# Altium PCB Isolated-ADCs-PCB.PcbDoc
Units mil, origin at the board's own origin, x right, y up, seen from the top; angles counter-clockwise.
Board outline 2120 x 1465.54 mil, 4 copper layers (Top Layer, Mid-Layer 1, Mid-Layer 2, Bottom Layer), stack 60.6 mil thick; 32 components, 24 nets, 130 pads, 341 vias.
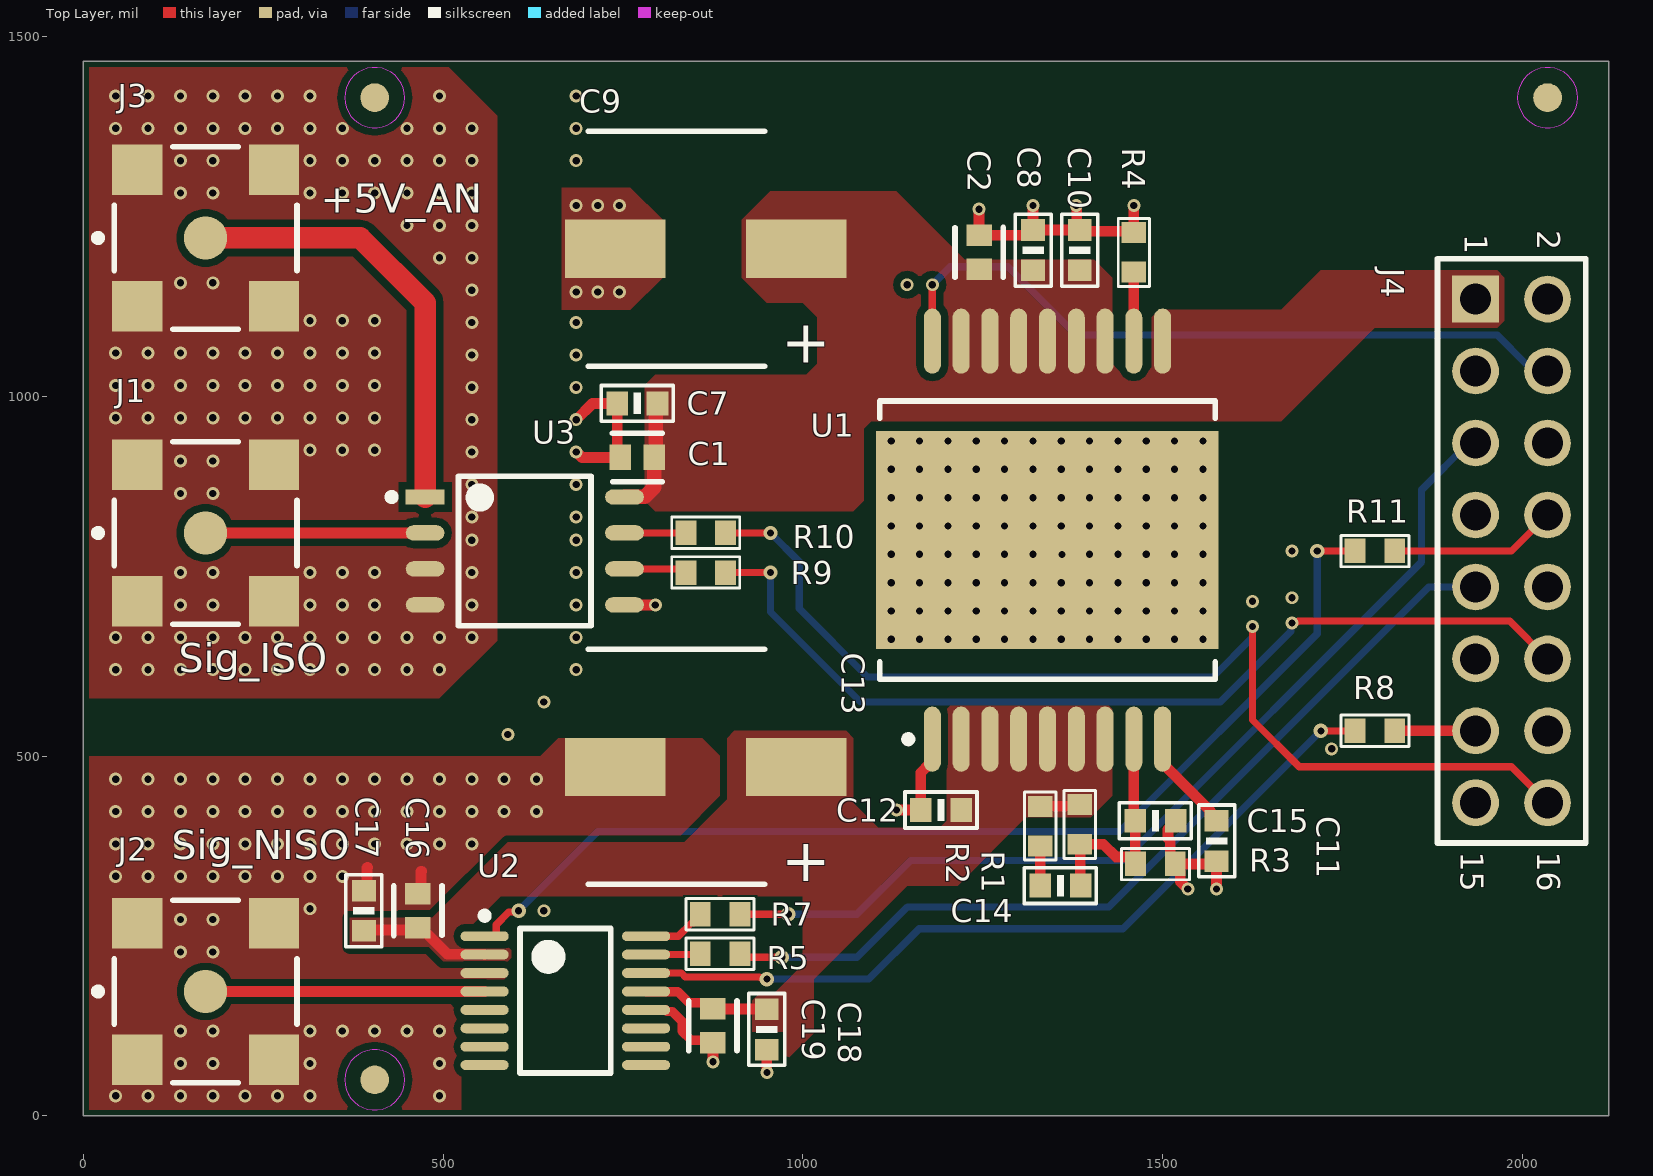
[diagram p0: Top Layer view]
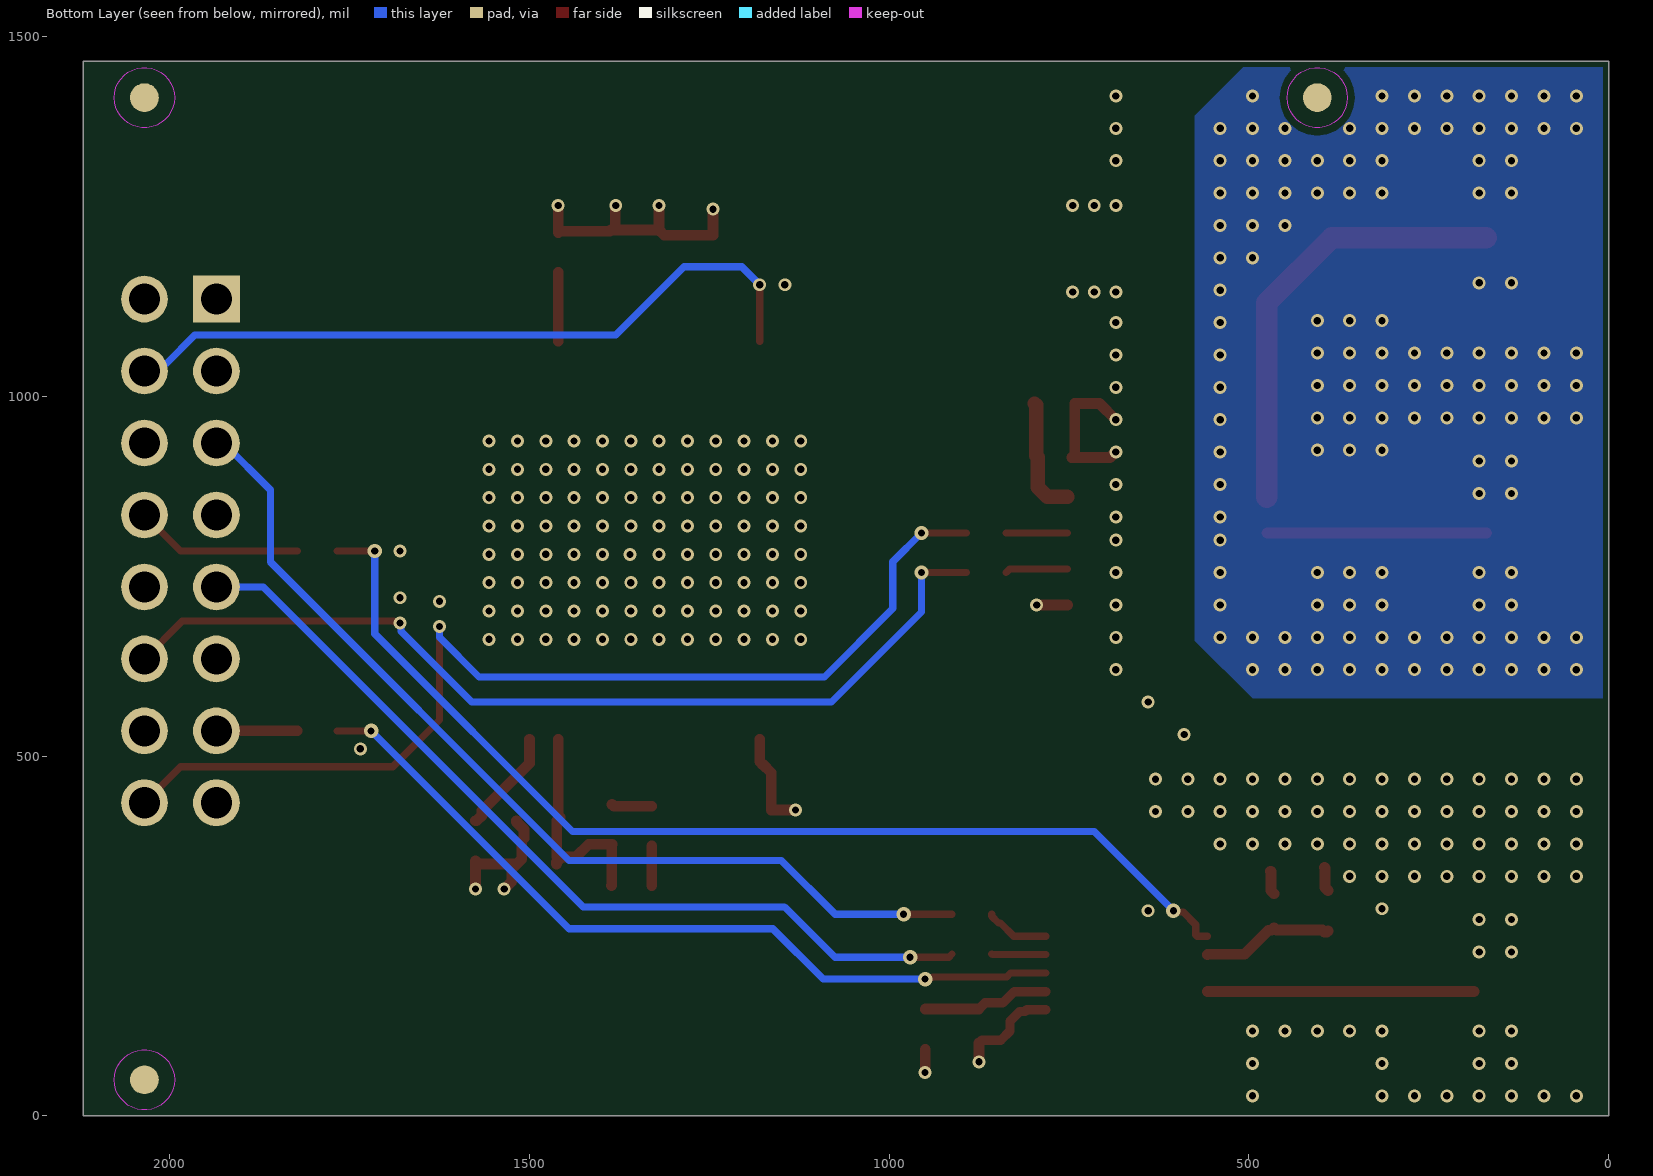
[diagram p1: Bottom Layer view, seen from below]
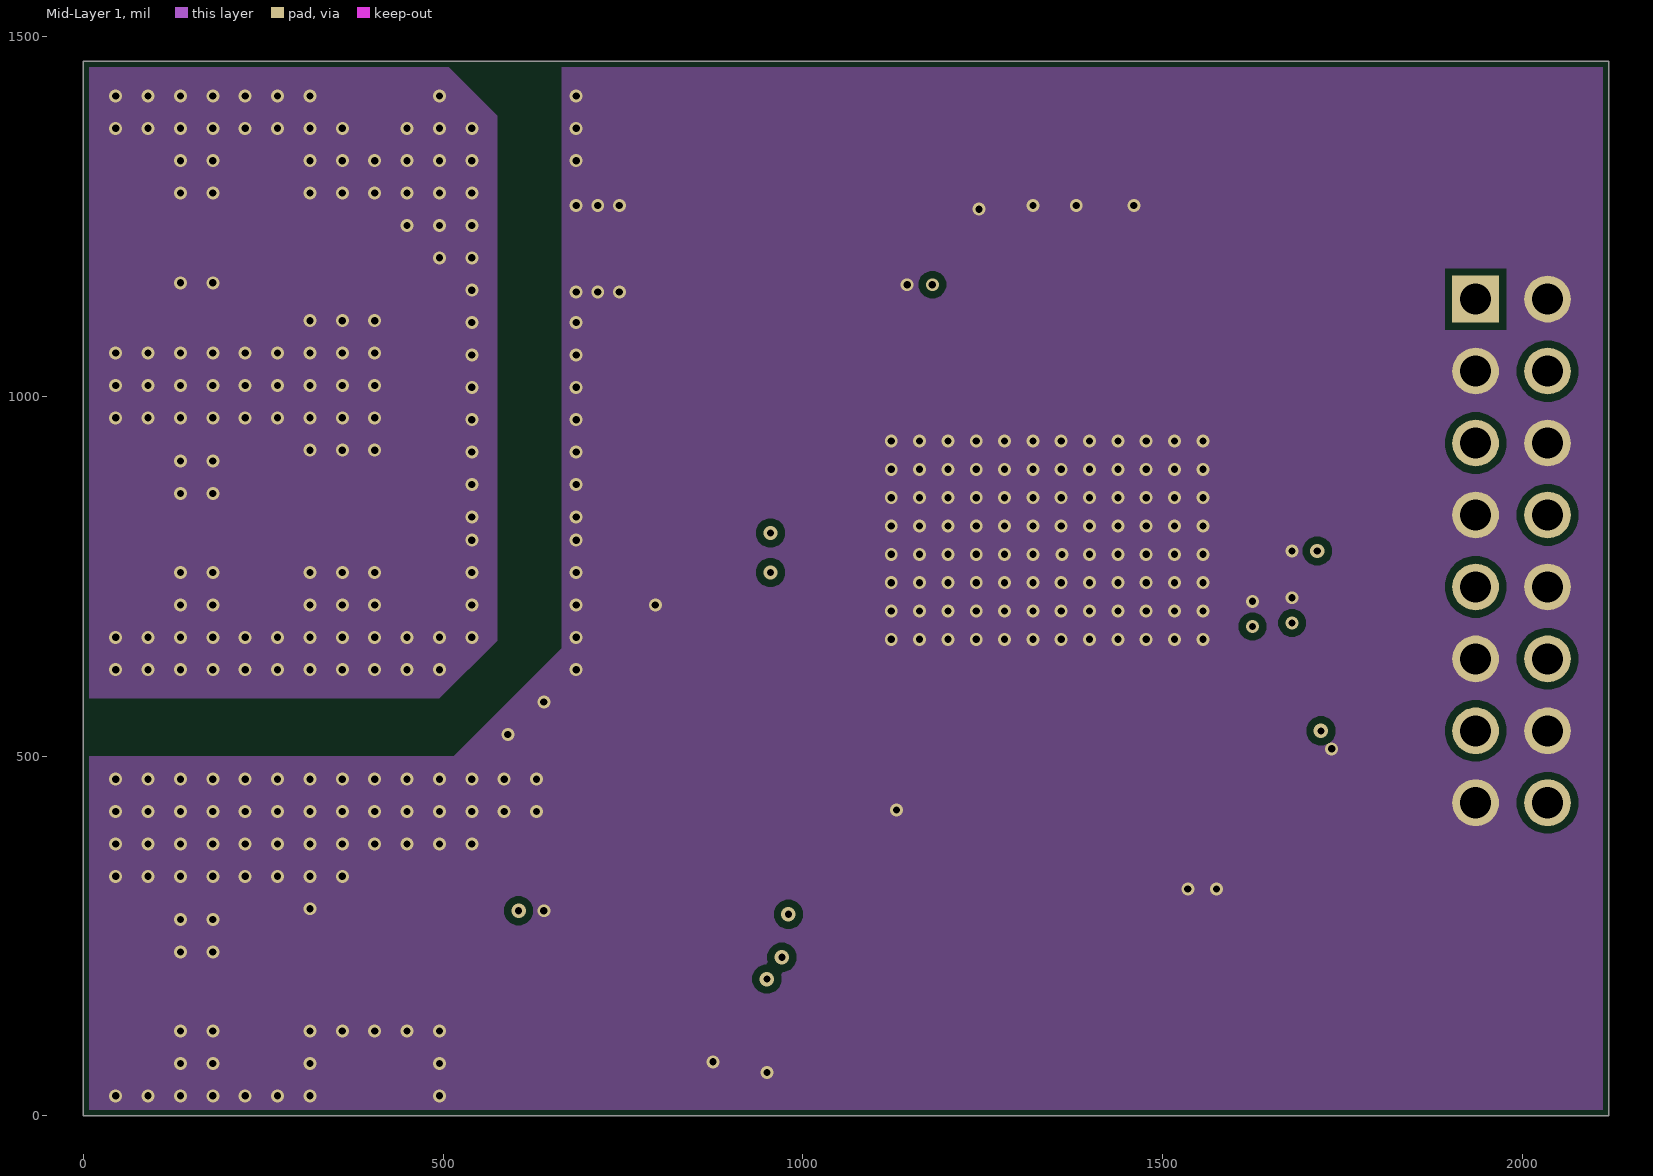
[diagram p2: Mid-Layer 1]
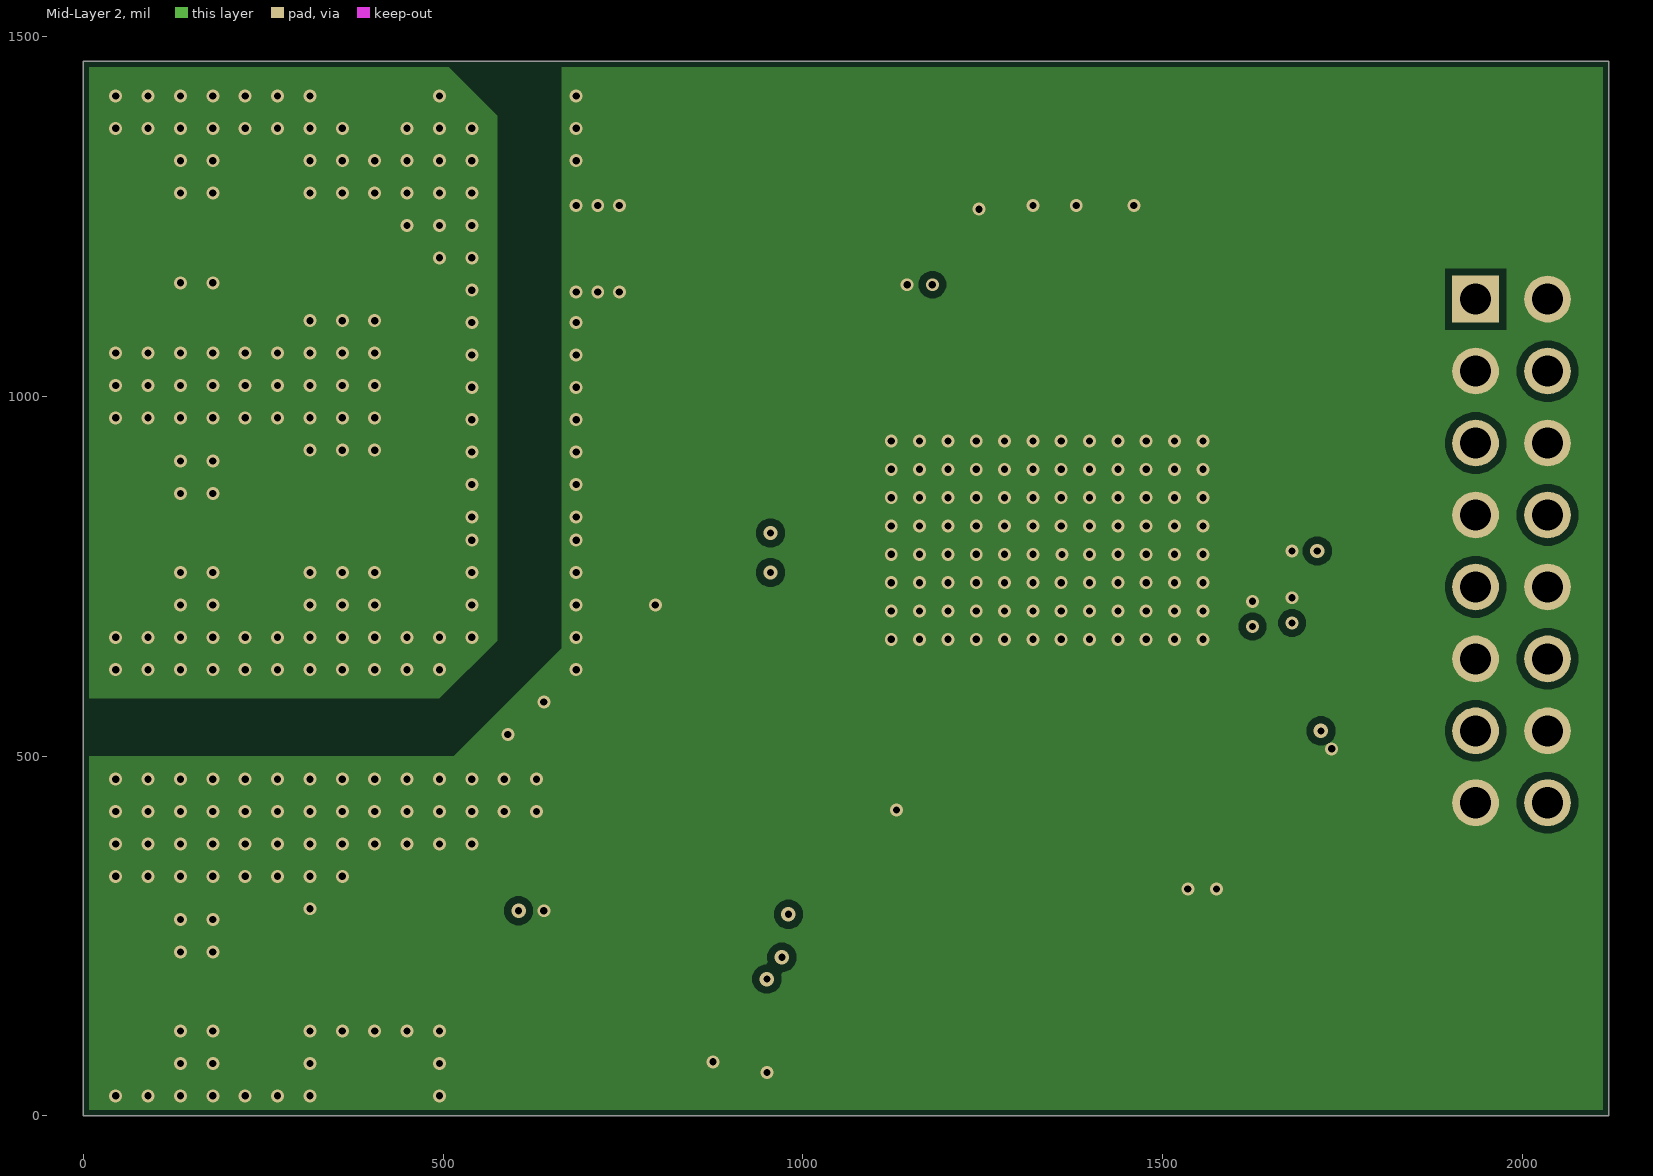
[diagram p3: Mid-Layer 2]
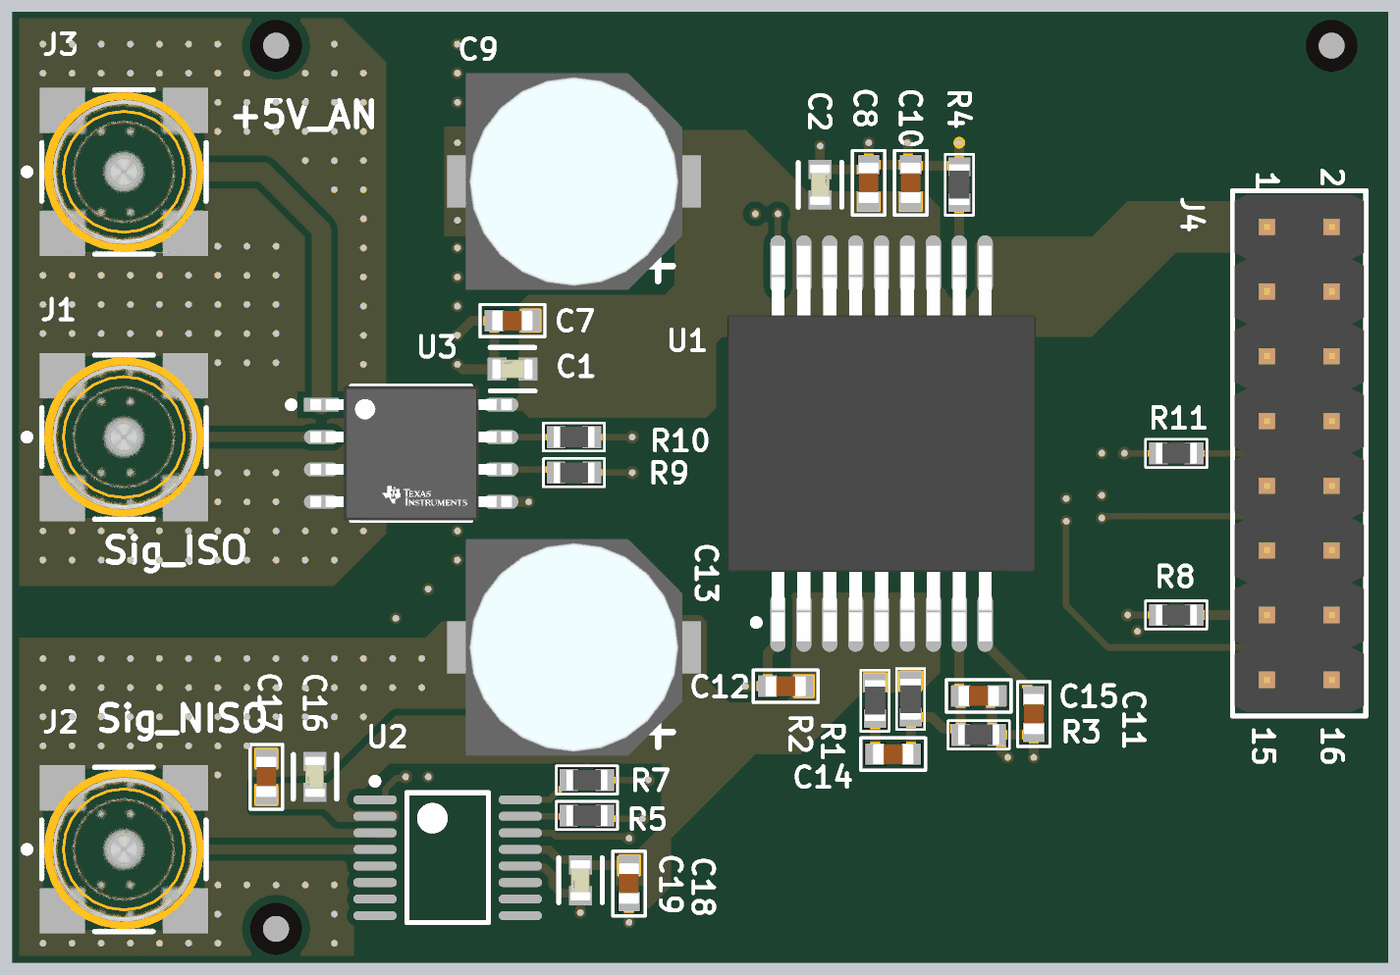
[diagram p4: 3D render of the assembled board from above, using the file's embedded part models]

## Layer stack, top to bottom
Top Solder: solder mask 0.4, Solder Resist, Dk 3.5
Top Layer: signal copper 1.4
Dielectric 1: prepreg 5, PP-006, Dk 4.1
Mid-Layer 1: signal copper 1.4
Dielectric 2: dielectric 45, FR-4, Dk 4.8
Mid-Layer 2: signal copper 1.4
Dielectric 3: prepreg 5, PP-006, Dk 4.1
Bottom Layer: signal copper 1.4
Bottom Solder: solder mask 0.4, Solder Resist, Dk 3.5

## Board outline
0,0 0,1465.54 2120,1465.54 2120,0

## Design rules (kind name [scope] priority, off if disabled: settings)
BoardOutlineClearance [All] p1: gap=8 ignorepadtopadclearanceinfootprint=FALSE
Clearance [All] p1: gap=10 ignorepadtopadclearanceinfootprint=FALSE except(0: Arc-Hole Track-Hole SMDPad-Hole THPad-Hole Via-Hole Fill-Hole Poly-Hole Region-Hole Text-Hole)
MinimumSolderMaskSliver [All] p1: minsoldermaskwidth=5
PolygonConnect [All] p1: connectstyle=Direct reliefconductorwidth=10 reliefentries=4 polygonreliefangle="90 Angle" airgapwidth=10
RoutingVias [All] p1: holewidth=10 width=18 viastyle="Through Hole" minholewidth=8 minwidth=16 maxholewidth=20 maxwidth=28
SilkToSilkClearance [All] p1: silktosilkclearance=5
SilkToSolderMaskClearance [IsPad] p1: minsilkscreentomaskgap=1 clearancetoexposedcopper=TRUE
SolderMaskExpansion [All] p1: expansion=0 istentingtop=FALSE
Width [All] p1: maxlimit=50 minlimit=4 preferedwidth=6
27 further rules are at their usual default settings.

## Components (designator, comment, footprint, x,y, rotation, side; value= is the part's Value field where it differs from the comment)
C1 "0.10 μF" FP-C0603C-CF-MFG 770,915 r0 top
C2 "0.10 μF" FP-C0603C-CF-MFG 1245,1200 r270 top
C7 "10uF" CAPC1608X90N 770,990 r180 top
C8 "10uF" CAPC1608X90N 1320,1203 r90 top
C9 "220uF/25V" CAP_AE830X1050N 865,1205 r180 top
C10 "0.1uF/50V" CAPC1608X90N 1385,1203 r90 top
C11 "0.1uF/50V" CAPC1608X90N 1575,382 r270 top
C12 "0.1uF/50V" CAPC1608X90N 1192,425 r180 top
C13 "220uF/25V" CAP_AE830X1050N 865,485 r180 top
C14 "4.7nF" CAPC1608X90N 1358,320 r0 top
C15 "100pF" CAPC1608X90N 1490,410 r0 top
C16 "0.10 μF" FP-C0603C-CF-MFG 465,285 r90 top
C17 "1uF" CAPC1608X90N 390,285 r90 top
C18 "1uF" CAPC1608X90N 950,120 r90 top
C19 "0.10 μF" FP-C0603C-CF-MFG 875,125 r90 top
J1 "73251-1350" FP-73251-1350-MFG 170,810 r0 top
J2 "73251-1350" FP-73251-1350-MFG 170,172.8 r0 top
J3 "73251-1350" FP-73251-1350-MFG 170,1220 r0 top
J4 "61301621121" 61301621121 1985,785 r270 top
R1 "4.32K" RESC1608X55N 1385,405 r90 top
R2 "2.67K" RESC1608X55N 1330,402.56 r90 top
R3 "806R" RESC1608X55N 1490,350 r180 top
R4 "511R" RESC1608X55N 1460,1200 r270 top
R5 "22R" RESC1608X55N 885,225 r0 top
R7 "22R" RESC1608X55N 885,280 r0 top
R8 "22R" RESC1608X55N 1795,535 r0 top
R9 "22R" RESC1608X55N 865,755 r0 top
R10 "22R" RESC1608X55N 865,810 r0 top
R11 "22R" RESC1608X55N 1795,785 r180 top
U1 "ISL75051ASEHVFE" CFP102P1520X310-18AN 1340,800 r90 top
U2 "ADC128S102CIMTX" MTC16_N 670,160 r0 top
U3 "AMC1203BPSA" FP-PSA0008A-IPC_C 613.6,785 r0 top

## Footprints (in the part's own frame and the unit in brackets; to place one, negate y for a bottom-side part, rotate by r counter-clockwise, add the part's x,y. Pads: shape width x height; smd on the part's side, far side on the other; paste and mask are expansions set on the pad)
61301621121 [mm] "Pin Header, pitch 2.54 mm, THT, Vertical, dual row, 16p"
  rect 1.65x1.65 hole 1.1: 1(-8.89,-1.27)
  round 1.65 hole 1.1: 2(-8.89,1.27) 3(-6.35,-1.27) 4(-6.35,1.27) 5(-3.81,-1.27) 6(-3.81,1.27) 7(-1.27,-1.27) 8(-1.27,1.27) 9(1.27,-1.27) 10(1.27,1.27) 11(3.81,-1.27) 12(3.81,1.27) 13(6.35,-1.27) 14(6.35,1.27) 15(8.89,-1.27) 16(8.89,1.27)
  silkscreen extent -10.31,-2.62 10.31,2.62, body extent -10.16,-2.54 10.16,2.54, height 8.59
CAP_AE830X1050N [mm]
  rect 3.55x2.05 smd: 1(-3.2,0) 2(3.2,0)
  silkscreen extent -2.07,-4.15 4.15,4.15, body extent -4.25,-4.25 4.25,4.25, height 10.5
CAPC1608X90N [mil]
  rect 30x33 smd mask+2: 1(-28,0) 2(28,0)
  silkscreen extent -50,-25 50,25, body extent -31,-16 31,16, height 35
CFP102P1520X310-18AN [mm]
  oval 2.3x0.6 smd: 1(-7.025,4.064) 2(-7.025,3.048) 3(-7.025,2.032) 4(-7.025,1.016) 5(-7.025,0) 6(-7.025,-1.016) 7(-7.025,-2.032) 8(-7.025,-3.048) 9(-7.025,-4.064) 10(7.025,-4.064) 11(7.025,-3.048) 12(7.025,-2.032) 13(7.025,-1.016) 14(7.025,0) 15(7.025,1.016) 16(7.025,2.032) 17(7.025,3.048) 18(7.025,4.064)
  rect 7.7x12.09 smd paste-5.969: EP(0,0)
  silkscreen extent -7.15,-5.92 4.91,5.92, body extent -7.76,-6.04 7.77,6.05, height 3.1
FP-73251-1350-MFG [mil]
  round 60 smd paste+0 mask+0: 1(0,0)
  rect 70x70 smd paste+0 mask+0: 2(-95,95) 3(95,95) 4(-95,-95) 5(95,-95)
  silkscreen extent -155,-127 127,127, body extent -134,-134 134,134, height 10
FP-C0603C-CF-MFG [mm]
  rect 0.75x0.9 smd paste+0 mask+0: 1(-0.6,0) 2(0.6,0)
  silkscreen extent -0.87,-0.85 0.88,0.85, body extent -1.2,-0.6 1.2,0.6, height 0.25
FP-PSA0008A-IPC_C [mil]
  rect 53.76x21.49 smd paste+0 mask+0: 1(-138.6,75)
  rrect100% 53.76x21.49 smd paste+0 mask+0: 2(-138.6,25) 3(-138.6,-25) 4(-138.6,-75) 5(138.6,-75) 6(138.6,-25) 7(138.6,25) 8(138.6,75)
  silkscreen extent -190,-104 92,104, body extent -169,-108 169,108, height 10
MTC16_N [mm] "TSOP, 16-Leads, Body 5x4.4mm, Pitch 0.65mm, IPC Medium Density"
  oval 1.7x0.35 smd: 1(-2.85,2.275) 2(-2.85,1.625) 3(-2.85,0.975) 4(-2.85,0.325) 5(-2.85,-0.325) 6(-2.85,-0.975) 7(-2.85,-1.625) 8(-2.85,-2.275) 9(2.85,-2.275) 10(2.85,-1.625) 11(2.85,-0.975) 12(2.85,-0.325) 13(2.85,0.325) 14(2.85,0.975) 15(2.85,1.625) 16(2.85,2.275)
  silkscreen extent -2.97,-2.55 1.6,3.12, body extent -2.25,-2.55 2.25,2.55, height 1.1
RESC1608X55N [mil]
  rect 29x34 smd mask+2: 1(-27.56,0) 2(27.56,0)
  silkscreen extent -47,-22 47,22, body extent -31,-16 31,16, height 22

## Part data
C1 C2 C16 C19: library part CMP-2006-03056-2, "CAP CER 0.1UF 50V 5% X7R 0603", Manufacturer=KEMET, Manufacturer Part Number=C0603C104J5RACTU, Package=C0603C-CF, Temperature="-55°C to +125°C", Temperature Characteristic=X7R, Temperature Coefficient=30ppm/°C, Temperature Range High=+125°C, Temperature Range Low=-55°C, Tolerance=0.05, Voltage Rating="50 V", Automotive=Yes, Automotive Grade="Grade 1", Capacitance="0.10 μF", Category=Cap, ComponentLink2Description=Datasheet, ComponentLink2URL=https://api.kemet.com/component-edge/download/datasheet/C0603C100J5GACAUTO.pdf, Device Class L1="Passive Components", Device Class L2=Capacitors, Device Class L3="Ceramic Capacitors", Digikey Description="CAP CER 0.1UF 50V 5% X7R 0603", Height=0.87mm, Lead Free=Yes, Material=Ceramic, Mouser Description="Multilayer Ceramic Capacitors MLCC - SMD/SMT 50volts 0.1uF X7R 5%", Octopart=https://octopart.com/c0603c104j5ractu-kemet-10440638, RoHS=TRUE
C7 C8: library part "CAP CER 10UF 25V X5R 0603", "CAP CER 10UF 25V X5R 0603", Manufacturer="Murata Electronics", Manufacturer Part Number=GRM188R61E106KA73D, Package=0603, Supplier Part Number 1=490-18214-1-ND, Tolerance=±10%, Voltage - Rated=25V, ComponentLink1Description="New link", Height=1mm, Supplier 1=Digi-Key
C9 C13: library part "CAP ALUM 220UF 20% 25V SMD", "CAP ALUM 220UF 20% 25V SMD", Manufacturer="United Chemi-Con", Manufacturer Part Number=EMZA250ADA221MHA0G, Supplier Part Number 1=565-2550-1-ND, Tolerance=±20%, ComponentLink1Description="New link", Height=10.5mm, Supplier 1=Digi-Key
C10 C11 C12: library part "CAP CER 0.1UF 50V X7R 0603", "CAP CER 0.1UF 50V X7R 0603", Manufacturer="Samsung Electro-Mechanics", Manufacturer Part Number=CL10B104KB8NNNC, Package=0603, Supplier Part Number 1=1276-1000-1-ND, Tolerance=±10%, Voltage - Rated=50V, ComponentLink1Description="New link", Height=0.9mm, Supplier 1=Digi-Key
C14: library part "CAP CER 4700PF 50V C0G 0603", "CAP CER 4700PF 50V C0G 0603", Manufacturer="TDK Corporation", Manufacturer Part Number=CGA3E2C0G1H472J080AA, Package=0603, Supplier Part Number 1=445-6912-1-ND, Tolerance=5%, Voltage - Rated=50V, ComponentLink1Description="New link", Height=0.9mm, Supplier 1=Digi-Key
C15: library part "CAP CER 100PF 50V C0G/NP0 0603", "CAP CER 100PF 50V C0G/NP0 0603", Manufacturer="KYOCERA AVX", Manufacturer Part Number=06035A101FAT2A, Package=0603, Supplier Part Number 1=478-6202-1-ND, Tolerance=1%, Voltage - Rated=50V, ComponentLink1Description="New link", Height=0.9mm, Supplier 1=Digi-Key
C17 C18: library part "CAP CER 1UF 25V X7R 0603", "CAP CER 1UF 25V X7R 0603", Manufacturer="Murata Electronics", Manufacturer Part Number=GCM188R71E105KA64D, Package=0603, Supplier Part Number 1=490-10673-1-ND, Tolerance=±10%, Voltage - Rated=25V, ComponentLink1Description="New link", Height=0.9mm, Supplier 1=Digi-Key
J1 J2 J3: library part CMP-04764-000006-1, "CONN SMA JACK STR 50 OHM SMD", Frequency=18GHz, Manufacturer=Molex, Temperature="-65°C to +165°C", Temperature Range High=+165°C, Temperature Range Low=-65°C, Voltage Rating=500V, Automotive=No, Category=Conn, ComponentLink2Description=Datasheet, ComponentLink2URL=https://www.molex.com/pdm_docs/sd/732511350_sd.pdf, Conn Orientation=Straight, Contact Material=Gold, Device Class L1=Connectors, Device Class L2="RF / Coaxial Connectors", Device Class L3=unset, Digikey Description="CONN SMA JACK STR 50 OHM SMD", Footprint Url=https://forum.upverter.com/uploads/default/original/3X/d/a/daeafa2ce4908d4fc4e49f0b17d7d2c986fce444.pdf, Height=9.655mm, Impedance=50Ω, Is Female=yes, Lead Free=Yes, Manufacturer Part Number=73251-1350, Mouser Description="RF Connectors / Coaxial Connectors SMA ST PCB-JCK STD SMT", Number Of Contacts=1, Octopart=https://octopart.com/73251-1350-molex-5414390, Package=73251-1350, RoHS=TRUE, Shielding=true, Standoff Height=0.41mm
J4: library part CMP-1502-01097-1, "THT Vertical Pin Header WR-PHD, Pitch 2.54 mm, Dual Row, 16 pins", Contact Resistance=20mOhm, Manufacturer="Wurth Elektronik", Operating Temperature=-40to105degC, Rated Current=3A, Withstanding Voltage=500VAC, Working Voltage=250VAC, Datasheet URL=https://katalog.we-online.de/em/datasheet/6130xx21121.pdf, Gender=Male, Manufacturer URL=http://www.we-online.de, Mounting Technology=THT, Orientation=Vertical, Package Reference=61301621121, Packaging=Bag, Part Number=61301621121, Pin Number=16, Pitch=2.54mm, Publisher=WurthElektronik, Row Number=Dual
R1: library part "RES SMD 4.32K OHM 0.5% 1/5W 0603", "RES SMD 4.32K OHM 0.5% 1/5W 0603", Manufacturer="Panasonic Electronic Components", Manufacturer Part Number=ERJ-PB3D4321V, Package=0603, Supplier Part Number 1=P20355CT-ND, Tolerance=0.5%, Height=0.55mm, Supplier 1=Digi-Key
R2: library part "RES SMD 2.67KOHM 0.5% 1/10W 0603", "RES SMD 2.67KOHM 0.5% 1/10W 0603", Manufacturer=Yageo, Manufacturer Part Number=RT0603DRD072K67L, Package=0603, Supplier Part Number 1=311-2.67KDCT-ND, Tolerance=0.5%, Height=0.55mm, Supplier 1=Digi-Key
R3: library part "RES SMD 806 OHM 0.5% 1/10W 0603", "RES SMD 806 OHM 0.5% 1/10W 0603", Manufacturer=Yageo, Manufacturer Part Number=RT0603DRD0762KL, Package=0603, Supplier Part Number 1=311-806DCT-ND, Tolerance=0.5%, Height=0.55mm, Supplier 1=Digi-Key
R4: library part "RES SMD 511 OHM 1% 1/10W 0603", "RES SMD 511 OHM 1% 1/10W 0603", Manufacturer="Panasonic Electronic Components", Manufacturer Part Number=ERJ-3EKF5110V, Package=0603, Supplier Part Number 1=P511HCT-ND, Tolerance=0.5%, Height=0.55mm, Supplier 1=Digi-Key
R5 R7 R8 R9 R10 R11: library part "RES SMD 22 OHM 0.5% 1/10W 0603", "RES SMD 22 OHM 0.5% 1/10W 0603", Manufacturer=Yageo, Manufacturer Part Number=RT0603DRD0722RL, Package=0603, Supplier Part Number 1=13-RT0603DRD0722RLCT-ND, Tolerance=0.5%, Height=0.55mm, Supplier 1=Digi-Key
U1: "Voltage regulator, linear, variable, 3 A, CFP-18 exposed pad, class V", EM Part Number=ISL75051ASEHFE/PROTO, FM (SMD) Part Number=5962R1121203VYC, Input Voltage High=6V, Input Voltage Low=2.2V, Manufacturer="Renesas / Intersil", Output Current Max=3A, Output Voltage="0.8 - 5.0V", Package="CFP-18 (exposed pad)", ComponentLink1Description="Datasheet - Manufacturer", ComponentLink1URL=https://www.renesas.com/us/en/www/doc/datasheet/isl75051aseh-3051aseh.pdf, ComponentLink2Description="Datasheet - Mil Spec", ComponentLink2URL=https://landandmaritimeapps.dla.mil/downloads/milspec/smd/11212.pdf, Device Class=V, Distributor=Avnet, Lead Form=Yes, Manufacturer Part Number=ISL75051ASEHVFE, Mass=1.07g, Mount Type=SMT, SEL=86.3MeV*cm2/mg, Supplier 1="Renesas / Intersil", Supplier Part Number 1=ISL75051ASEHVFE, TID="50krad (LDR), 100krad (HDR)"
U2: library part CMP-0054-00337-2, "8-Channel, 500 kSPS to 1 MSPS, 12-Bit A/D Converter, 16-pin TSSOP", Manufacturer="National Semiconductor", PackageTopMarking=NSUZXYTT*128S102*CIMT, PowerWise=Y, Code_JEDEC=MO-153-AB, ComponentLink1Description="ADC128S102 Datasheet", ComponentLink1URL=http://www.national.com/ds/AD/ADC128S102.pdf, ComponentLink2Description="ADC128S102 Web Page", ComponentLink2URL=http://www.national.com/pf/AD/ADC128S102.html, ComponentLink3Description="MTC16 Package Page", ComponentLink3URL=http://www.national.com/packaging/folders/mtc16.html, CompType="ADC IC", DatasheetVersion=Jul-2009, PackageDescription="Molded TSSOP, Jedec, 5 x 4.4 x 0.9mm Body, 16 Lead, 0.65mm Pitch", PackageReference=MTC16, PackageVersion="revD, Jun-2003", PinCount=16, RevisionNote="Component URLs added", RoHS=N
U3: library part CMP-04860-000036-1, "IC ADC 16BIT SIGMA-DELTA 8SOP", Case/Package=SOP, Max Operating Temperature=105°C, Max Power Dissipation=110mW, Max Supply Voltage=5.5V, Min Operating Temperature=-40°C, Min Supply Voltage=4.5V, Operating Supply Voltage=5V, Package Quantity=95, Power Consumption=80mW, Contact Plating=Gold, Differential Nonlinearity=1LSB, Input Type=DIFFERENTIAL, Integral Nonlinearity (INL)=6LSB, Interface=Serial, Lead Free="Lead Free", Mount="Surface Mount", Number of A/D Converters=1, Number of Analog Inputs=1, Number of Bits=16, Number of Channels=1, Number of Converters=1, Number of Elements=1, Number of Inputs=1, Number of Pins=8, Packaging=Rail/Tube, Polarity=Bipolar, Power Dissipation=80mW, Resolution=16b, RoHS Compliant=Yes, Sampling Rate=40KS/s, Signal to Noise Ratio (SNR)=85dB, Supply Type=Analog

## Free pads (board coordinates)
  round 40 smd mask+20: 0(405,50) 0(405,1415) 0(2035,1415)
  round 40 smd far side mask+20: 0(405,1415) 0(2035,50) 0(2035,1415)

## Via types
v1: diameter 18, hole 10, Top Layer to Bottom Layer, tented both sides, 236 vias
v2: diameter 18, hole 10, Top Layer to Bottom Layer, 97 vias
v3: diameter 20, hole 10, Top Layer to Bottom Layer, tented both sides, 8 vias

## Nets (pads, with @x,y where several pads share a name; then routed paths per layer and width w, separated by ;. In a path a pad name is that pad's centre, name@x,y a point inside that pad or via, vN(x,y) a via of type N, cw(c..) or ccw(c..) an arc to the next point about the centre after c; other vN are vias at no path point)
3V3: C12.1 C13.1 C16.1 C17.1 C18.2 C19.2 R1.2 R2.2 U1.2 U1.3 U1.4 U1.5 U1.6 U1.7 U2.2 U2.13 | length 420.2
  Top Layer w13: U2.13 782.35,172.65 826.3,172.65 842.06,156.89 866.74,156.89 C19.2
  Top Layer w15: C17.1 392,255 395,255 398.19,258.19 461.81,258.19 C16.1 468.62,257.76 472.95,257.76 506.12,224.59 557.19,224.59 U2.2 ; C19.2@875.62,148 875.93,148.31 949.69,148.31 C18.2 ; R2.2 1382.56,430.12 R1.2
+5V: C1.2 C2.2 C7.1 C8.1 C9.1 C10.1 J4.1 U1.10 U1.12 U1.13 U1.14 U1.15 U1.16 U1.17 U3.8 | length 165.2
  Top Layer w20: U3.8 752.48,860.28 780.19,860.28 793.62,873.72 C1.2 795.81,917.19 795.81,987.81 C7.1
+5V_AN: J3.1 U3.1 | length 612.3
  Top Layer w30: J3.1 385,1220 475,1130 U3.1
AGND: J1.2 J1.3 J1.4 J1.5 J3.2 J3.3 J3.4 J3.5 U3.3 U3.4
  other v1: 45,620 90,620 135,620 180,620 225,620 270,620 315,620 360,620 405,620 450,620 495,620 45,665 90,665 135,665 180,665 225,665 270,665 315,665 360,665 405,665 450,665 495,665 540,665 135,710 180,710 315,710 360,710 405,710 540,710 135,755 180,755 315,755 360,755 405,755 540,755 540,800 540,832.39 135,865 180,865 540,877.39 135,910 180,910 540,922.39 315,925 360,925 405,925 540,967.39 45,970 90,970 135,970 180,970 225,970 270,970 315,970 360,970 405,970 540,1012.39 45,1015 90,1015 135,1015 180,1015 225,1015 270,1015 315,1015 360,1015 405,1015 540,1057.39 45,1060 90,1060 135,1060 180,1060 225,1060 270,1060 315,1060 360,1060 405,1060 540,1102.39 315,1105 360,1105 405,1105 540,1147.39 135,1157.61 180,1157.61 495,1192.39 540,1192.39 450,1237.39 495,1237.39 540,1237.39 135,1282.39 180,1282.39 315,1282.39 360,1282.39 405,1282.39 450,1282.39 495,1282.39 540,1282.39 135,1327.39 180,1327.39 315,1327.39 360,1327.39 405,1327.39 450,1327.39 495,1327.39 540,1327.39 45,1372.39 90,1372.39 135,1372.39 180,1372.39 225,1372.39 270,1372.39 315,1372.39 360,1372.39 450,1372.39 495,1372.39 540,1372.39 45,1417.39 90,1417.39 135,1417.39 180,1417.39 225,1417.39 270,1417.39 315,1417.39 495,1417.39
CS: R11.2 U2.1 | length 1507.2
  Top Layer w10: U2.1 572.08,249.57 573.83,251.31 573.83,265.6 591.44,283.21 603.21,283.21 v3(605,285) ; v3(1715,785) R11.2
  Bottom Layer w10: v3(605,285) 715,395 1440,395 1715,670 v3(1715,785)
DIN: R8.1 U2.14 | length 1131.6
  Top Layer w10: U2.14 831.34,198.39 836.73,193 939.93,193 941.02,191.91 948.09,191.91 v3(950,190) ; v3(1720,535) R8.1
  Bottom Layer w10: v3(950,190) 1091.71,190 1161.71,260 1445,260 v3(1720,535)
DOUT: J4.9 R5.2 | length 1237.6
  Top Layer w10: R5.2 917.29,220.27 v3(970.85,220.27)
  Bottom Layer w10: v3(970.85,220.27) 1075.27,220.27 1145.27,290.27 1425.27,290.27 1870,735 J4.9
GND: C1.1 C2.1 C7.2 C8.2 C9.2 C10.2 C11.2 C12.2 C13.2 C15.2 C16.2 C17.2 C18.1 C19.1 J2.2 J2.3 J2.4 J2.5 J4.2 J4.3 J4.6 J4.7 J4.10 J4.11 J4.14 J4.15 R3.1 R4.1 U1.1 U1.EP U2.3 U2.12 U3.5 | length 1204.5
  Top Layer w13: U2.12 808.99,147.2 811.19,145 818.47,145 832.17,131.3 832.17,117.83 845,105 871.38,105 C19.1
  Top Layer w15: C17.2 394.43,317.43 394.43,344.43 395,345 ; C16.2 469.43,313.05 469.43,339.43 470,340 ; v1(685,922.39) 685.81,922.39 693.2,915 C1.1 742,919.38 C7.2 707.61,990 v1(685,967.39) ; U3.5 v1(795,710) ; v1(875,75) C19.1 ; v1(950,60) C18.1 ; v1(1130,425) C12.2 ; C12.2@1164,426.5 1164,476.86 1175.45,488.31 1176.02,488.31 1180,492.29 U1.1 ; v1(1245,1260) C2.1 1312.62,1223.62 C8.2 ; v1(1320,1265) C8.2 ; v1(1380,1265) 1380.57,1264.43 1380.57,1235.43 C10.2 C8.2 ; C10.2@1386.5,1231 1388.22,1229.28 1458.28,1229.28 R4.1 v2(1460,1265) ; C15.2 1518,408.5 1507.56,398.06 1507.56,385.63 1510.56,382.63 1510.56,357 R3.1 ; v1(1535,315) 1524.56,325.44 1524.56,343 R3.1 ; v1(1575,315) C11.2 1571,350 R3.1
  other v1: 45,27.8 90,27.8 135,27.8 180,27.8 225,27.8 270,27.8 315,27.8 495,27.8 135,72.8 180,72.8 315,72.8 495,72.8 135,117.8 180,117.8 315,117.8 360,117.8 405,117.8 450,117.8 495,117.8 135,227.8 180,227.8 135,272.8 180,272.8 640,285 315,287.8 45,332.8 90,332.8 135,332.8 180,332.8 225,332.8 270,332.8 315,332.8 360,332.8 45,377.8 90,377.8 135,377.8 180,377.8 225,377.8 270,377.8 315,377.8 360,377.8 405,377.8 450,377.8 495,377.8 540,377.8 45,422.8 90,422.8 135,422.8 180,422.8 225,422.8 270,422.8 315,422.8 360,422.8 405,422.8 450,422.8 495,422.8 540,422.8 585,422.8 630,422.8 45,467.8 90,467.8 135,467.8 180,467.8 225,467.8 270,467.8 315,467.8 360,467.8 405,467.8 450,467.8 495,467.8 540,467.8 585,467.8 630,467.8 1735,510 590,530 640,575 685,620 685,665 685,710 1625,715 1680,720 685,755 1680,785 685,800 685,832.39 685,877.39 685,1012.39 685,1057.39 685,1102.39 685,1145 715,1145 745,1145 1145,1155 685,1265 715,1265 745,1265 685,1327.39 685,1372.39 685,1417.39
  other v2: 1122.87,662.2 1162.24,662.2 1201.61,662.2 1240.99,662.2 1280.36,662.2 1319.73,662.2 1359.1,662.2 1398.47,662.2 1437.84,662.2 1477.21,662.2 1516.58,662.2 1555.95,662.2 1122.87,701.57 1162.24,701.57 1201.61,701.57 1240.99,701.57 1280.36,701.57 1319.73,701.57 1359.1,701.57 1398.47,701.57 1437.84,701.57 1477.21,701.57 1516.58,701.57 1555.95,701.57 1122.87,740.95 1162.24,740.94 1201.61,740.94 1240.99,740.94 1280.36,740.94 1319.73,740.94 1359.1,740.94 1398.47,740.94 1437.84,740.94 1477.21,740.94 1516.58,740.94 1555.95,740.94 1122.87,780.32 1162.24,780.32 1201.61,780.32 1240.99,780.32 1280.36,780.32 1319.73,780.32 1360,780 1398.47,780.32 1437.84,780.32 1477.21,780.32 1516.58,780.32 1555.95,780.32 1122.87,819.69 1162.24,819.69 1201.61,819.69 1240.99,819.69 1280.36,819.69 1319.73,819.69 1359.1,819.69 1398.47,819.69 1437.84,819.69 1477.21,819.69 1516.58,819.69 1555.95,819.69 1122.87,859.06 1162.24,859.06 1201.61,859.06 1240.99,859.06 1280.36,859.06 1319.73,859.06 1359.1,859.06 1398.47,859.06 1437.84,859.06 1477.21,859.06 1516.58,859.06 1555.95,859.06 1122.87,898.43 1162.24,898.43 1201.61,898.43 1240.99,898.43 1280.36,898.43 1319.73,898.43 1359.1,898.43 1398.47,898.43 1437.84,898.43 1477.21,898.43 1516.58,898.43 1555.95,898.43 1122.87,937.8 1162.24,937.8 1201.61,937.8 1240.99,937.8 1280.36,937.8 1319.73,937.8 1359.1,937.8 1398.47,937.8 1437.84,937.8 1477.21,937.8 1516.58,937.8 1555.95,937.8
MCLK: J4.16 R10.2 | length 1478.8
  Top Layer w10: R10.2 v3(955,810) ; v1(1625,680) 1625,550 1690,485 1985,485 J4.16
  Bottom Layer w10: v3(955,810) 995,770 995,705 1090,610 1570,610 1625,665 v1(1625,680)
MDAT: J4.12 R9.2 | length 1323.7
  Top Layer w10: R9.2 892.82,755.27 954.74,755.27 v3(955,755) ; v1(1680,685) 1681.53,686.53 1687.19,686.53 1688.18,687.52 1982.48,687.52 J4.12
  Bottom Layer w10: v3(955,755) 955,700 1080,575 1580,575 1678.47,673.47 1678.47,683.47 v1(1680,685)
NetC11_1: C11.1 U1.9 | length 145.4
  Top Layer w15: U1.9 1500,490 1566,424 1566,417.5 1573.5,410 C11.1
NetC14_1: C14.1 R2.1 | length 55
  Top Layer w15: C14.1 R2.1
NetC14_2: C14.2 C15.1 R1.1 R3.2 U1.8 | length 308.3
  Top Layer w15: C14.2 1385.5,320.5 1385.5,376.94 R1.1 1417.56,377.44 1435.5,359.5 1455.44,359.5 1462.44,352.5 R3.2 ; C15.1@1457,415 1460,418 U1.8 ; R3.2@1462,359.5 C15.1
NetJ1_1: J1.1 U3.2 | length 305
  Top Layer w15: J1.1 U3.2
NetJ2_1: J2.1 U2.4 | length 370.6
  Top Layer w15: J2.1@187.21,172.8 U2.4
NetJ4_5: J4.5 R7.2 | length 1352.3
  Top Layer w10: R7.2 v3(980,280)
  Bottom Layer w10: v3(980,280) 1075,280 1150,355 1445,355 1860,770 1860,870 1925,935 J4.5
NetJ4_8: J4.8 R11.1 | length 233.2
  Top Layer w10: R11.1 1985,785 J4.8
NetJ4_13: J4.13 R8.2 | length 112.4
  Top Layer w15: R8.2 J4.13
NetR4_2: R4.2 U1.11 | length 95.9
  Top Layer w15: U1.11 R4.2
NetR5_1: R5.1 U2.15 | length 75.7
  Top Layer w10: U2.15 856.42,223.98 R5.1
NetR9_1: R9.1 U3.6 | length 87.3
  Top Layer w10: U3.6 832.44,760 R9.1
NetR10_1: R10.1 U3.7 | length 85.2
  Top Layer w10: U3.7 R10.1
PGOOD: J4.4 U1.18 | length 1003.8
  Top Layer w10: U1.18 v1(1180,1155)
  Bottom Layer w10: v1(1180,1155) 1205,1180 1285,1180 1380,1085 1964.99,1085 2004.47,1045.52 2024.48,1045.52 J4.4
SCLK: R7.1 U2.16 | length 89.3
  Top Layer w10: U2.16 827.01,249.57 845.44,268 847.94,268 857.44,277.5 R7.1
pads on no net: U2.5 U2.6 U2.7 U2.8 U2.9 U2.10 U2.11

## Polygon pours and split planes (outlines as drawn)
AGND on Top Layer "NONET_L-01_P-001" (solid, pour order 0): 0,578.46 1.54,580 495,580 575,660 575,1390 496.96,1468.04 0,1468.04
GND on Top Layer "NONET_L-01_P-001" (solid, pour order 19): 580,205 585,205 590,200 590,195 585,190 525,190 525,0.68 524.32,0 0,0 0,499.55 0.45,500 635,500 660,525 860,525 885,500 885,445 830,390 590,390 580,380
+5V on Top Layer "Top Layer-+5V" (solid, pour order 22): 780,855 795,840 1070,840 1085,855 1085,955 1095,965 1665,965 1795,1095 1965,1095 1975,1105 1975,1115 1975,1165 1965,1175 1720,1175 1665,1120 1495,1120 1485,1110 1485,1040 1470,1025 1450,1025 1428.78,1046.22 1430,1080 1430,1165 1405,1190 1225,1190 1130,1285 955,1285 915,1245 915,1165 950,1130 1000,1130 1020,1110 1020,1045 1005,1030 795,1030 780,1015
3V3 on Top Layer "Top Layer-3V3" (solid, pour order 17): 1400,415 1430,445 1430,565 1425,570 1205,570 1200,565 1200,410 1190,400 1105,400 1070,435 1070,525 1060,535 905,535 895,525 895,440 835,380 590,380 485,275 370,275 370,235 480,235 500,215 590,215 595,220 595,230 590,235 530,235 520,245 580,305 1000,305 1000,210 960,170 940,170 930,160 930,75 975,75 1015,115 1015,190 1145,320 1215,320 1310,415 1250,415
GND on Top Layer "NONET_L-01_P-001" (solid, pour order 20): 665,1120 760,1120 805,1165 805,1245 760,1290 665,1290
AGND on Mid-Layer 2 "NONET_L-01_P-001" (solid, pour order 1): 0,578.46 1.54,580 495,580 575,660 575,1390 496.96,1468.04 0,1468.04
GND on Mid-Layer 2 "NONET_L-01_P-001" (solid, pour order 5): 0,500 515,500 665,650 665,1465.54 2120,1465.54 2120,0 0,0
AGND on Mid-Layer 1 "NONET_L-01_P-001" (solid, pour order 3): 0,578.46 1.54,580 495,580 575,660 575,1390 496.96,1468.04 0,1468.04
GND on Mid-Layer 1 "NONET_L-01_P-001" (solid, pour order 18): 0,500 515,500 665,650 665,1465.54 2120,1465.54 2120,0 0,0
AGND on Bottom Layer "NONET_L-01_P-001" (solid, pour order 2): 0,578.47 1.53,580 495,580 575,660 575,1390 496.96,1468.05 0,1468.05

## Keep-outs
Top Layer:
  circle w1: c405,1415 r41.83
  circle w1: c2035,1415 r41.83
  circle w1: c405,50 r41.83
Bottom Layer:
  circle w1: c405,1415 r41.83
  circle w1: c2035,50 r41.83
  circle w1: c2035,1415 r41.83
  circle w1: c405,1415 r41.83

## Silkscreen, mask and mechanical layers (free items; w line width, h text height)
Top Overlay:
  text "+5V_AN" at 330,1255 h40
  text "Sig_ISO" at 133,616.33 h40
  text "Sig_NISO" at 123,356.33 h40
Board Outline:
  the board outline again, w4

## Text inside footprints (layer, text, board x,y; h text height)
C9: Top Overlay "+" at 1038.47,1097.67 h60 r180
C13: Top Overlay "+" at 1038.47,377.67 h60 r180
J4: Top Overlay "2" at 2020.43,1230.67 h32 r270; Top Overlay "1" at 1920,1225 h32 r270; Top Overlay "15" at 1914.13,366.89 h32 r270; Top Overlay "16" at 2020.43,366.89 h32 r270